# Altium PCB PCB.PcbDoc
Units mm, origin at the board's own origin, x right, y up, seen from the top; angles counter-clockwise.
Board outline 47.04 x 50.47 mm, 2 copper layers (Top Layer, Bottom Layer); 78 components, 60 nets, 244 pads, 45 vias.
Unrouted connection lines stored in the file: 1.
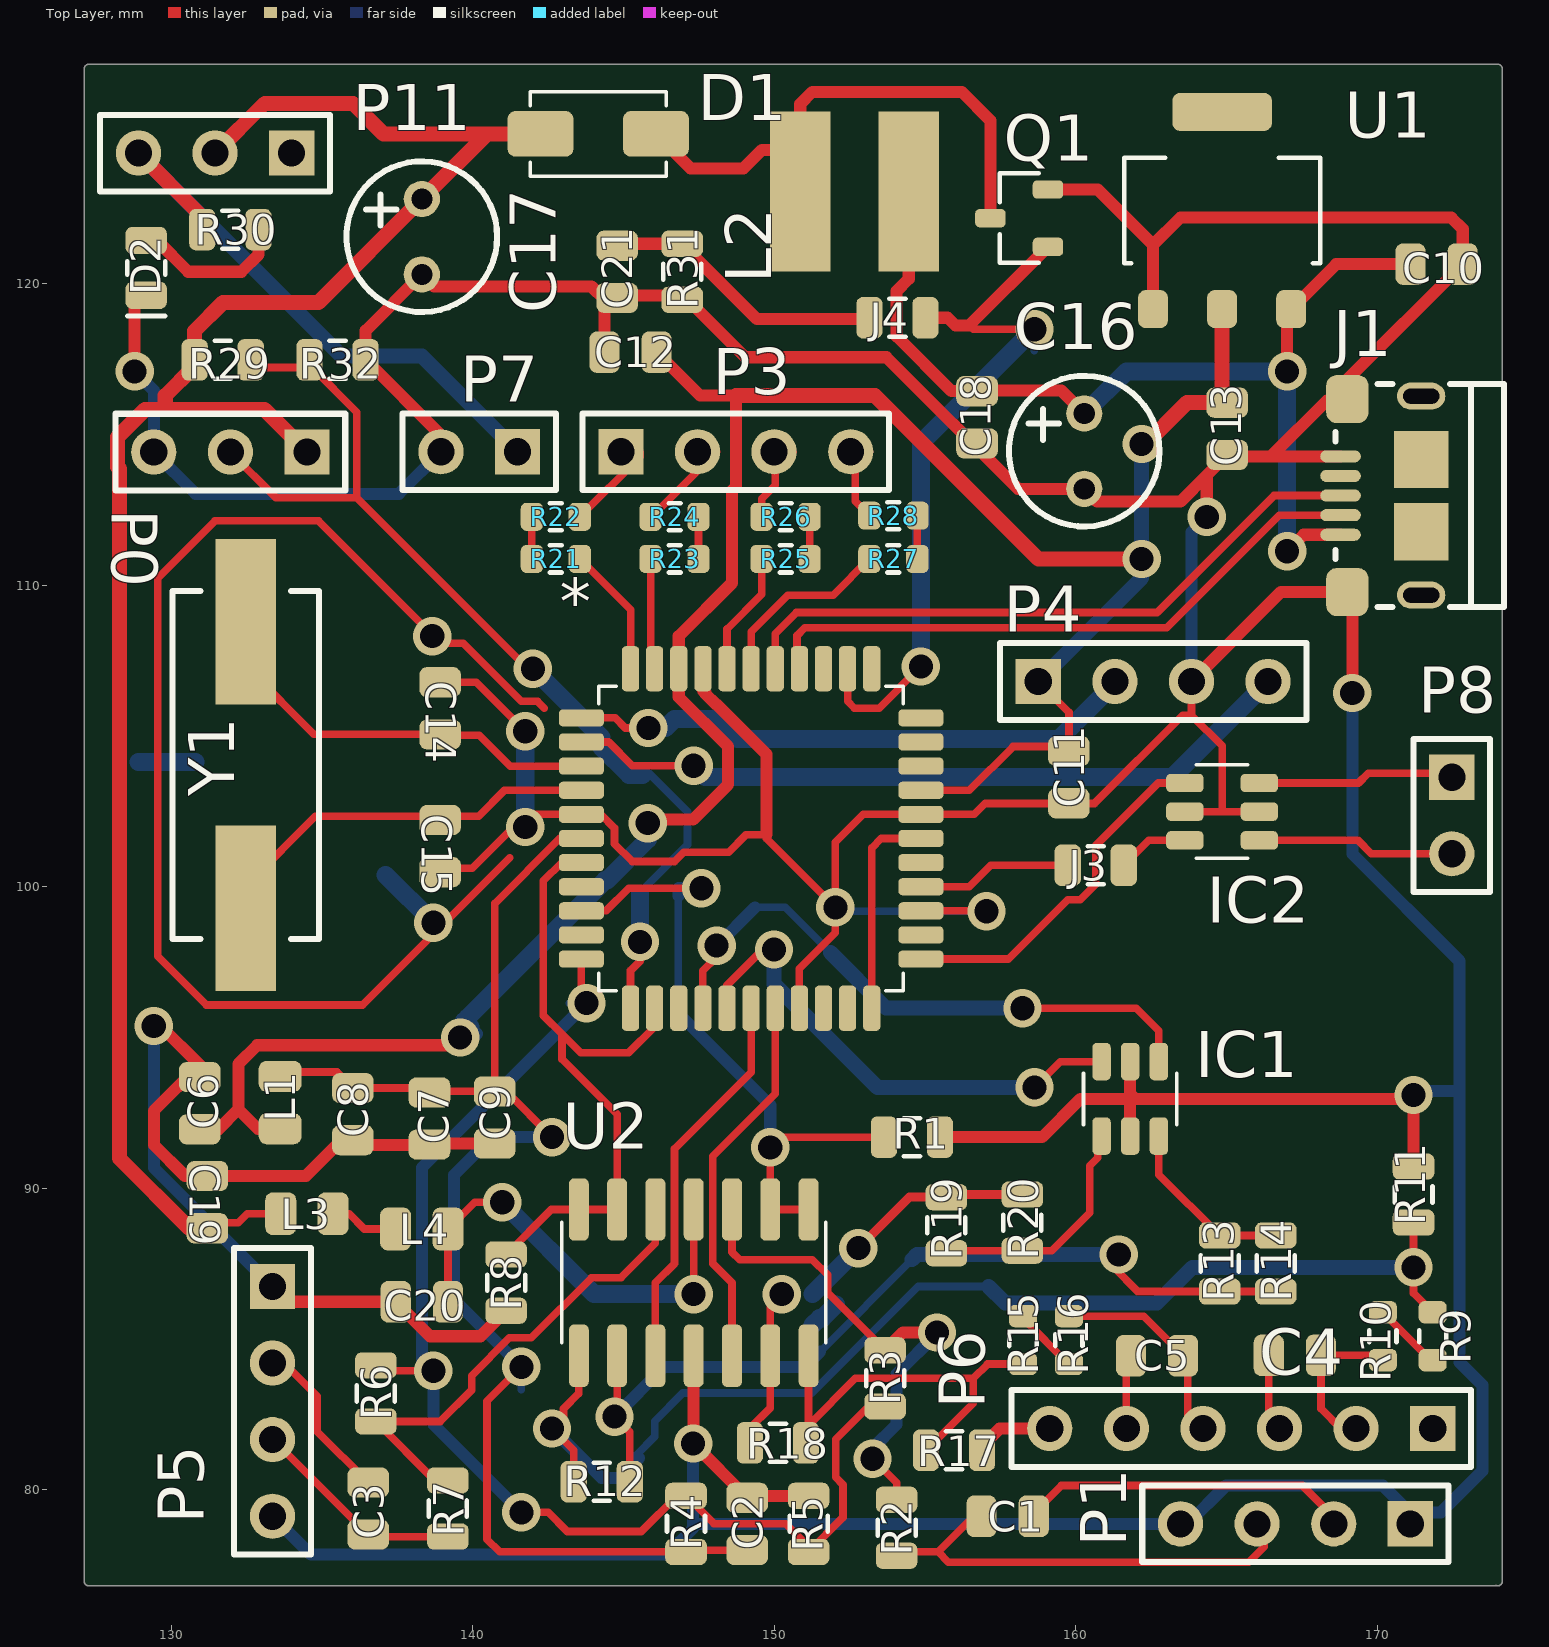
[diagram p0: Top Layer view]
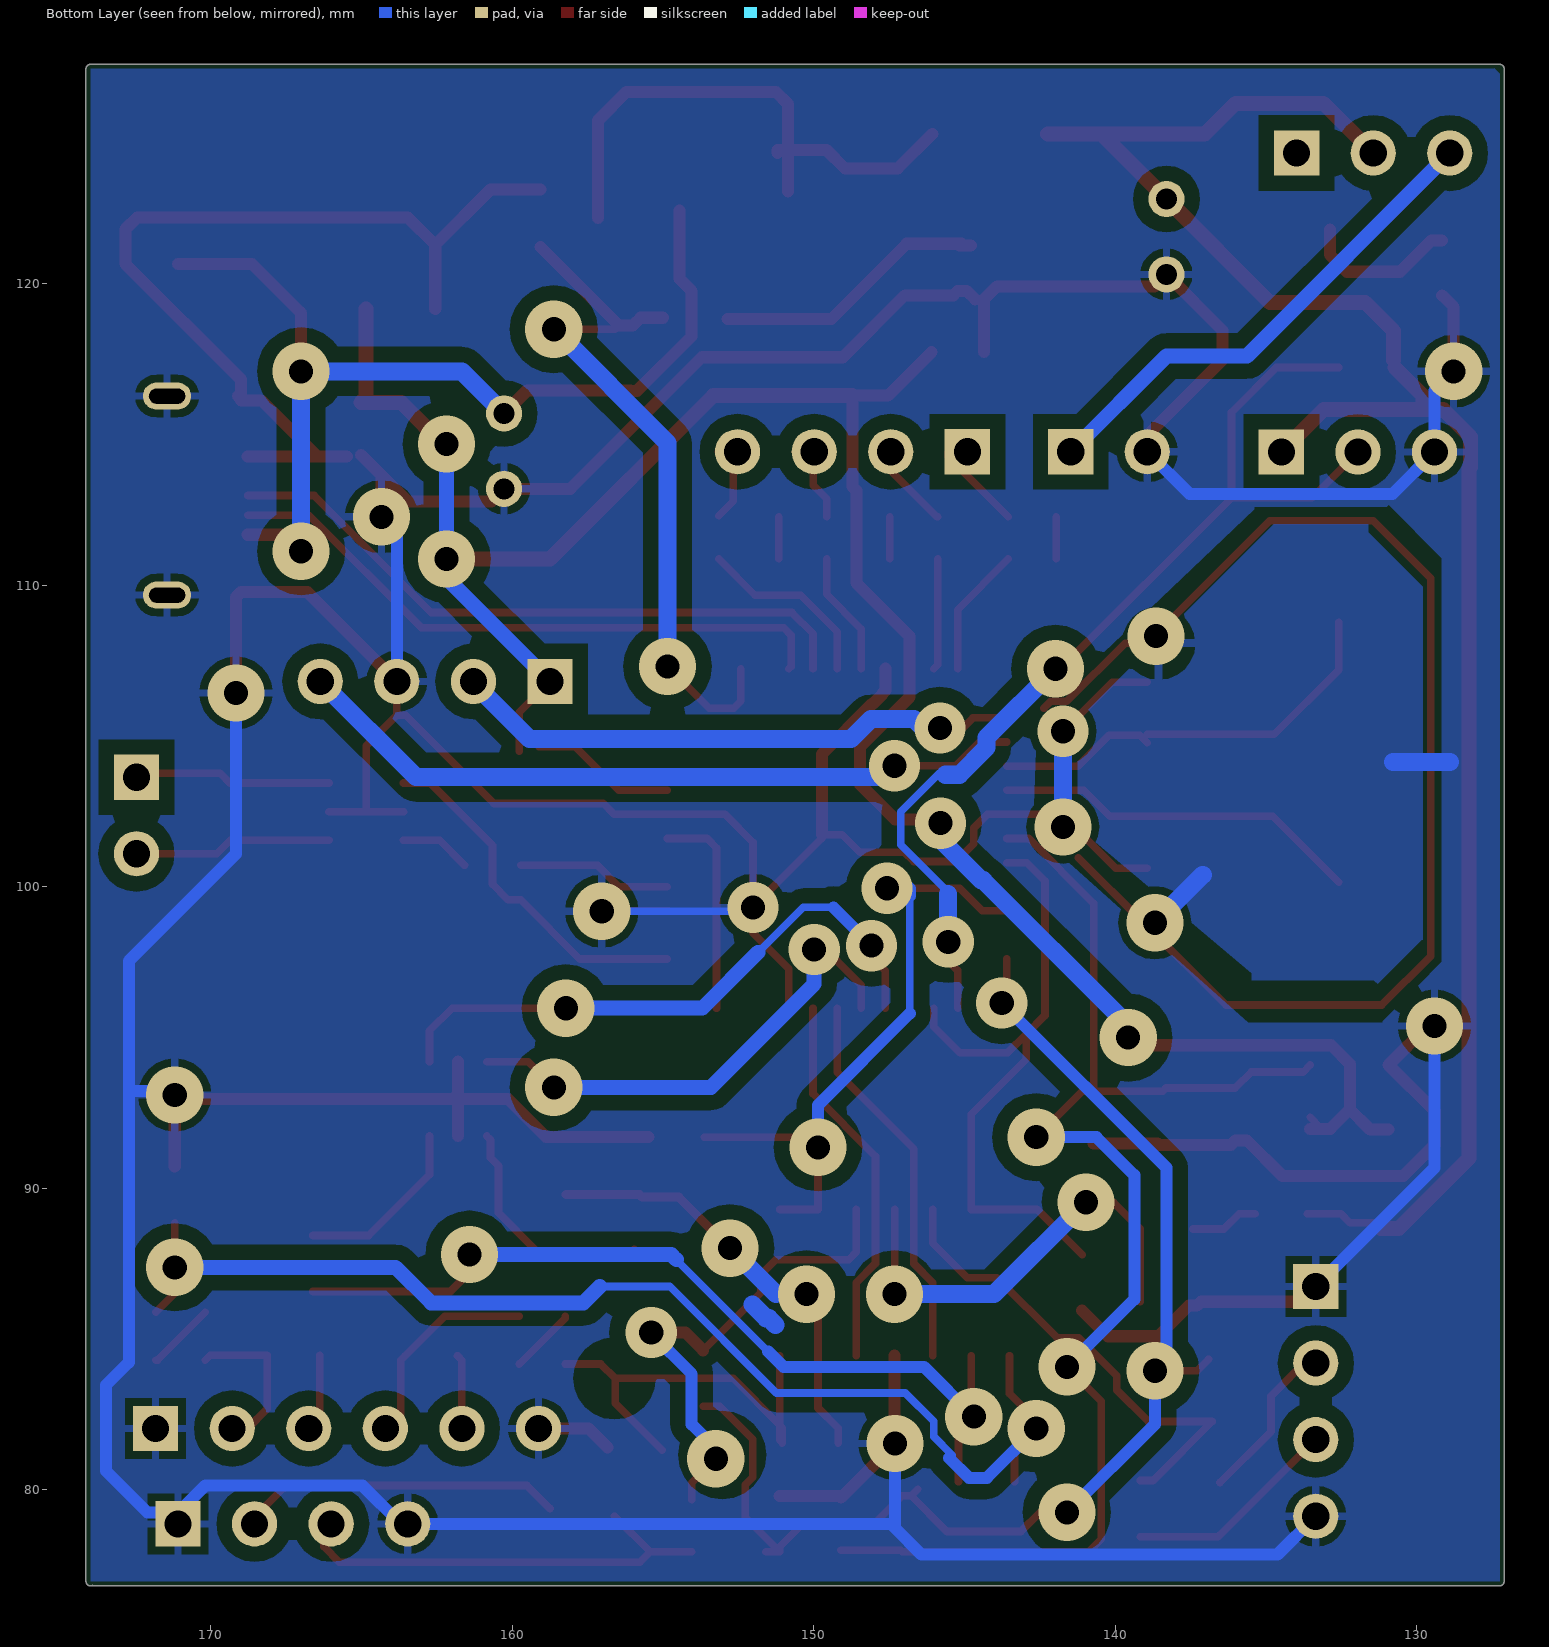
[diagram p1: Bottom Layer view, seen from below]
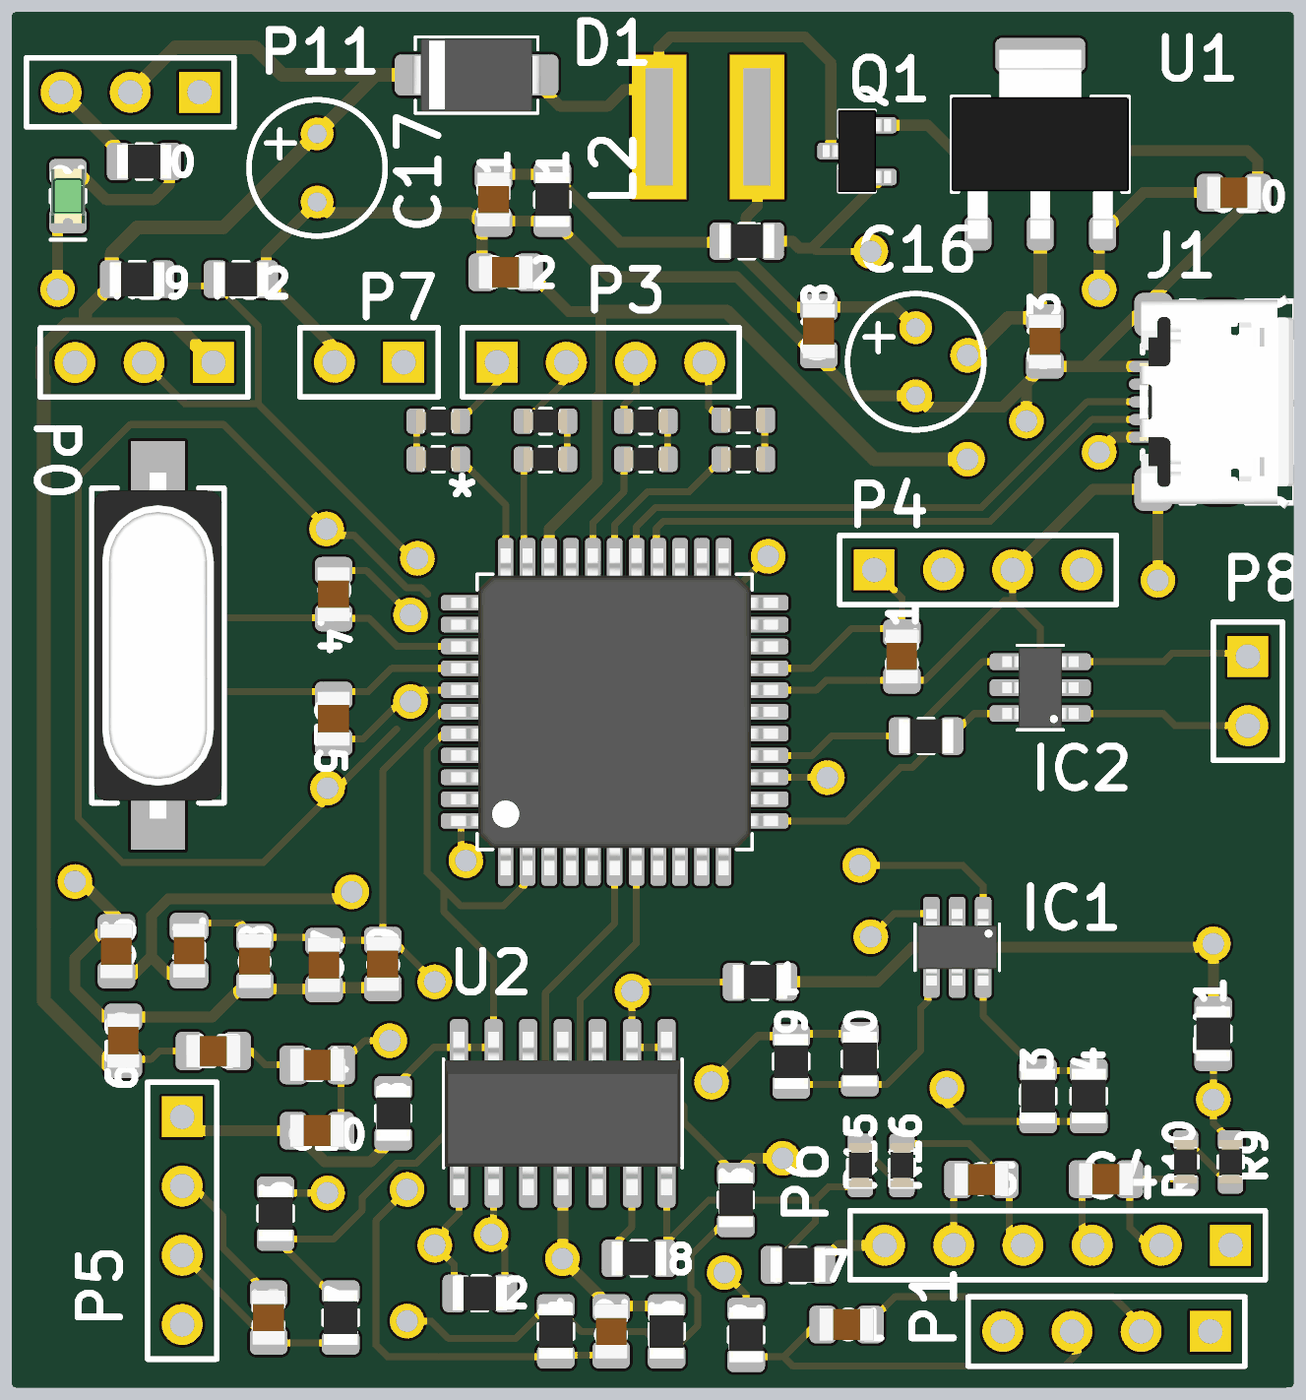
[diagram p2: 3D render of the assembled board from above, using the file's embedded part models]

## Layer stack, top to bottom
Top Solder: solder mask 0.0102, Solder Resist, Dk 3.5
Top Layer: signal copper 0.0356
Dielectric 1: dielectric 0.32, FR-4, Dk 4.8
Bottom Layer: signal copper 0.0356
Bottom Solder: solder mask 0.0102, Solder Resist, Dk 3.5

## Board outline
127.104,76.962 127.104,127.127 cw(c127.254,127.127) 127.254,127.277 173.99,127.277 cw(c173.99,127.127) 174.14,127.127 174.14,76.962 cw(c173.99,76.962) 173.927,76.826 cw(c173.863,76.962) 173.863,76.812 127.254,76.812 cw(c127.254,76.962)

## Design rules (kind name [scope] priority, off if disabled: settings)
Clearance [All] p1: gap=0.2 ignorepadtopadclearanceinfootprint=FALSE
PolygonConnect [All] p1: connectstyle=Relief reliefconductorwidth=0.254 reliefentries=4 polygonreliefangle="90 Angle" airgapwidth=0.254
RoutingVias [All] p1: holewidth=0.8 width=1.2 viastyle="Through Hole" minholewidth=0.8 minwidth=1.2 maxholewidth=0.8 maxwidth=2
SolderMaskExpansion [All] p1: expansion=0.102
Width [All] p1: maxlimit=2.54 minlimit=0.127 preferedwidth=0.254
30 further rules are at their usual default settings.

## Classes and differential pairs
component class Labrador: * C14 C15 IC2 J1 P3 P4 P8 R21 R22 R23 R24 R25 R26 R27 R28 Y1
component class Power: C6 C7 C8 C9 C10 C11 C12 C13 C16 C17 C18 C19 C20 C21 C? D1 D2 D? L1 L2 L3 L4 L? P0 P7 P11 Q1 R29 R30 R31 R32 R? U1
component class Analog: C1 C2 C3 C4 C5 IC1 P1 P5 P6 R1 R2 R3 R4 R5 R6 R7 R8 R9 R10 R11 R12 R13 R14 R15 R16 R17 R18 R19 R20 R? U2

## Components (designator, comment, footprint, x,y, rotation, side; value= is the part's Value field where it differs from the comment)
* "Atxmega32A4U-AN" QFP44P80_1200X1200X120L60X37N 149.225,101.6 r0 top locked
C1 "1µF" CAPC200X125X75L45N 157.734,79.121 r180 top
C2 "1µF" CAPC200X125X75L45N 149.098,78.867 r270 top
C3 "1µF" CAPC200X125X75L45N 136.525,79.375 r270 top
C4 "1µF" CAPC200X125X75L45N 167.259,84.455 r0 top
C5 "1µF" CAPC200X125X75L45N 162.687,84.443 r180 top
C6 "1µF" CAPC200X125X75L45N 130.937,92.818 r270 top
C7 "1nF" CAPC200X125X75L45N 138.557,92.31 r90 top
C8 "0.47µF" CAPC200X125X75L45N 136.017,92.456 r90 top
C9 "0.10µF" CAPC200X125X75L45N 140.716,92.348 r90 top
C10 "4.7µF" CAPC200X125X75L45N 171.958,120.65 r180 top
C11 "1µF" CAPC200X125X75L45N 159.766,103.632 r90 top
C12 "1µF" CAPC200X125X75L45N 145.225,117.729 r0 top
C13 "0.47µF" CAPC200X125X75L45N 165.014,115.189 r90 top
C14 "20pF" CAPC200X125X75L45N 138.91,101.346 r270 top
C15 "20pF" CAPC200X125X75L45N 138.91,105.918 r90 top
C16 "CAP_POLAR" Cap_Elec_47uF 160.274,113.197 r90 top value=220uF
C17 "CAP_POLAR" Cap_Elec_47uF 138.303,120.309 r90 top value=220uF
C18 "1µF" CAPC200X125X75L45N 156.718,115.57 r90 top
C19 "1µF" CAPC200X125X75L45N 131.191,89.535 r270 top
C20 "1µF" CAPC200X125X75L45N 138.303,86.233 r0 top
C21 "0.10µF" CAPC200X125X75L45N 144.78,120.396 r90 top
D1 "FM5819-W" DIOM470X266X220L114X139N 144.155,124.968 r0 top
D2 "RED" LEDC200X125X38L45N 129.159,120.523 r90 top
IC1 "AO6802" "ALPHAOMEGA TSOP-6" 161.798,92.964 r180 top
IC2 "AO6802" "ALPHAOMEGA TSOP-6" 164.846,102.489 r90 top
J1 "Micro USB" "FCI USB 10118193-0001LF" 171.4,112.973 r270 top
J3 "Jumper" RESC200X125X50L35N 160.655,100.711 r0 top
J4 "Jumper" RESC200X125X50L35N 154.078,118.872 r0 top
L1 "22uH" CAPC200X125X140L45N 133.604,92.842 r90 top
L2 "100uH" CD54-Modified 152.654,123.063 r180 top
L3 "22uH" CAPC200X125X140L45N 134.493,89.154 r0 top
L4 "22uH" CAPC200X125X140L45N 138.303,88.646 r0 top
P0 "Expansion" HDR1X3 134.493,114.417 r180 top
P1 "SCOPE_OUT" HDR1X4 171.088,78.867 r180 top
P3 "DIG_OUT" HDR1X4 144.907,114.427 r0 top
P4 "PDI" HDR1X4 158.75,106.807 r0 top
P5 "SCOPE_OUT" HDR1X4 133.35,86.741 r270 top
P6 "DAC_OUT" HDR1X6 171.831,82.03 r180 top
P7 "PSU" HDR1X2 141.478,114.427 r180 top
P8 "DIG_IN" HDR1X2 172.466,103.632 r270 top
P11 "SWITCH" HDR1X3 133.985,124.333 r180 top
Q1 "2N7002" SOT23-3P95_230X110L30X43N 158.115,122.174 r90 top
R1 "1K" RESC200X125X50L35N 154.559,91.694 r180 top
R2 "1M" RESC200X125X50L35N 154.051,78.74 r90 top
R3 "75K" RESC200X125X50L35N 153.67,83.693 r90 top
R4 "1K" RESC200X125X50L35N 147.066,78.867 r270 top
R5 "1K" RESC200X125X50L35N 151.13,78.867 r90 top
R6 "75K" RESC200X125X50L35N 136.779,83.193 r90 top
R7 "1M" RESC200X125X50L35N 139.168,79.375 r90 top
R8 "1K" RESC200X125X50L35N 141.097,86.868 r270 top
R9 "28R" RESC160X80X55L25N 171.831,85.09 r270 top
R10 "28R" RESC160X80X55L25N 170.18,85.09 r270 top
R11 "1K" RESC200X125X50L35N 171.196,89.789 r270 top
R12 "1K" RESC200X125X50L35N 144.272,80.264 r0 top
R13 "1K" RESC200X125X50L35N 164.766,87.503 r270 top
R14 "1K" RESC200X125X50L35N 166.624,87.503 r270 top
R15 "28R" RESC160X80X55L25N 158.242,84.963 r90 top
R16 "28R" RESC160X80X55L25N 159.766,84.963 r90 top
R17 "1K" RESC200X125X50L35N 155.956,81.309 r180 top
R18 "1K" RESC200X125X50L35N 150.114,81.551 r0 top
R19 "1K" RESC200X125X50L35N 155.702,88.773 r270 top
R20 "1K" RESC200X125X50L35N 158.223,88.859 r270 top
R21 "28R" RESC160X80X55L25N 142.748,110.871 r180 top
R22 "28R" RESC160X80X55L25N 142.748,112.268 r0 top
R23 "28R" RESC160X80X55L25N 146.685,110.871 r0 top
R24 "28R" RESC160X80X55L25N 146.685,112.268 r180 top
R25 "28R" RESC160X80X55L25N 150.368,110.871 r0 top
R26 "28R" RESC160X80X55L25N 150.368,112.268 r180 top
R27 "28R" RESC160X80X55L25N 153.943,110.871 r0 top
R28 "28R" RESC160X80X55L25N 153.943,112.308 r180 top
R29 "1K" RESC200X125X50L35N 131.699,117.475 r180 top
R30 "1K" RESC200X125X50L35N 131.953,121.793 r180 top
R31 "1K" RESC200X125X50L35N 146.939,120.396 r90 top
R32 "100R" RESC200X125X50L35N 135.509,117.475 r180 top
U1 "AMS1117-3.3" SOT223-4P229_700X180L36X74N 164.846,122.428 r0 top
U2 "LM324" SOIC14P127_865X600X175L83X41N 147.32,86.868 r180 top locked
Y1 "8MHz" "TXC 9C" 132.461,104.036 r270 top

## Footprints (in the part's own frame and the unit in brackets; to place one, negate y for a bottom-side part, rotate by r counter-clockwise, add the part's x,y. Pads: shape width x height; smd on the part's side, far side on the other; paste and mask are expansions set on the pad)
"ALPHAOMEGA TSOP-6" [mm] "Small Outline Pkg (SOP), 0.95 mm pitch; 6 pin, 2.90 mm L X 1.60 mm W X 1.25 mm H body"
  rrect49% 0.61x1.24 smd: 1(-0.95,-1.235) 2(0,-1.235) 3(0.95,-1.235) 4(0.95,1.235) 5(0,1.235) 6(-0.95,1.235)
  silkscreen extent -1.55,-0.85 1.55,0.85, body extent -1.45,-1.4 1.45,1.4, height 1.25
Cap_Elec_47uF [mm]
  round 1.2 hole 0.7: 1(0,0) 2(2.5,0)
  silkscreen extent -1.25,-2.5 3.75,2.5
CAPC200X125X75L45N [mm]
  rrect50% 1x1.38 smd: 1(-0.865,0) 2(0.865,0)
  body extent -1,-0.6 1,0.6, height 0.95
CAPC200X125X140L45N [mm] "Capacitor, Chip; 2.00 mm L X 1.25 mm W X 1.40 mm H body"
  rrect49% 1.03x1.42 smd: 1(-0.87,0) 2(0.87,0)
  body extent -1,-0.6 1,0.6, height 1.2
CD54-Modified [mm]
  rect 2x5.3 smd paste-0.5: 1(-1.8,0)
  rect 2x5.3 smd paste-0.5 mask+0.102: 2(1.8,0)
DIOM470X266X220L114X139N [mm] "Diode, Molded Body; 4.70 mm L X 2.665 mm W X 2.20 mm H body"
  rrect33% 2.18x1.51 smd: A(1.915,0) C(-1.915,0)
  silkscreen extent -2.25,-1.4 2.25,1.4, body extent -2.35,-1.33 2.35,1.33, height 2.2
"FCI USB 10118193-0001LF" [mm] "USB 2.0 Type B Micro"
  oval 0.4x1.35 smd: 1(1.3,-2.625) 2(0.65,-2.625) 3(0,-2.625) 4(-0.65,-2.625) 5(-1.3,-2.625)
  oval 0.9x1.6 hole 0.5 slot 1.2 at 90 deg: S(-3.3,0.05) S(3.3,0.05)
  rrect50% 1.6x1.4 smd: S(-3.2,-2.4) S(3.2,-2.4)
  rect 1.9x1.8 smd: S(-1.2,0.05) S(1.2,0.05)
  silkscreen extent -3.7,-2.8 3.7,2.8, body extent -3.93,-2.9 3.93,2.76, height 2.78
HDR1X2 [mm] "Connector; Header; 2 Position"
  rect 1.5x1.5 hole 0.9: 1(0,0)
  round 1.5 hole 0.9: 2(2.54,0)
  silkscreen extent -1.27,-1.27 3.81,1.27
HDR1X3 [mm] "Connector; Header; 3 Position"
  rect 1.5x1.5 hole 0.9: 1(0,0)
  round 1.5 hole 0.9: 2(2.54,0) 3(5.08,0)
  silkscreen extent -1.27,-1.27 6.35,1.27
HDR1X4 [mm] "Connector; Header; 4 Position"
  rect 1.5x1.5 hole 0.9: 1(0,0)
  round 1.5 hole 0.9: 2(2.54,0) 3(5.08,0) 4(7.62,0)
  silkscreen extent -1.27,-1.27 8.89,1.27
HDR1X6 [mm] "Connector; Header; 6 Position"
  rect 1.5x1.5 hole 0.9: 1(0,0)
  round 1.5 hole 0.9: 2(2.54,0) 3(5.08,0) 4(7.62,0) 5(10.16,0) 6(12.7,0)
  silkscreen extent -1.27,-1.27 13.97,1.27
LEDC200X125X38L45N [mm] "LED, Chip; 2.00 mm L X 1.25 mm W X 0.38 mm H body"
  rrect51% 0.91x1.38 smd: A(0.91,0) C(-0.91,0)
  silkscreen extent -1.6,-0.63 0.23,0.63, body extent -1.01,-0.62 1.01,0.63, height 1.11
QFP44P80_1200X1200X120L60X37N [mm] "Quad Flat Pack (QFP), 0.80 mm pitch; square, 11 pin X 11 pin, 10.00 mm L X 10.00 mm W X 1.20 mm H body"
  rrect49% 0.57x1.5 smd: 1(-4,-5.63) 2(-3.2,-5.63) 3(-2.4,-5.63) 4(-1.6,-5.63) 5(-0.8,-5.63) 6(0,-5.63) 7(0.8,-5.63) 8(1.6,-5.63) 9(2.4,-5.63) 10(3.2,-5.63) 11(4,-5.63) 23(4,5.63) 24(3.2,5.63) 25(2.4,5.63) 26(1.6,5.63) 27(0.8,5.63) 28(0,5.63) 29(-0.8,5.63) 30(-1.6,5.63) 31(-2.4,5.63) 32(-3.2,5.63) 33(-4,5.63)
  rrect49% 1.5x0.57 smd: 12(5.63,-4) 13(5.63,-3.2) 14(5.63,-2.4) 15(5.63,-1.6) 16(5.63,-0.8) 17(5.63,0) 18(5.63,0.8) 19(5.63,1.6) 20(5.63,2.4) 21(5.63,3.2) 22(5.63,4) 34(-5.63,4) 35(-5.63,3.2) 36(-5.63,2.4) 37(-5.63,1.6) 38(-5.63,0.8) 39(-5.63,0) 40(-5.63,-0.8) 41(-5.63,-1.6) 42(-5.63,-2.4) 43(-5.63,-3.2) 44(-5.63,-4)
  silkscreen extent -5.05,-5.05 5.05,5.05, body extent -6,-6 6,6, height 1.2
RESC160X80X55L25N [mm] "Resistor, Chip; 1.60 mm L X 0.80 mm W X 0.55 mm H body"
  rrect51% 0.74x0.93 smd: 1(-0.795,0) 2(0.795,0)
  silkscreen extent -0.2,-0.45 0.2,0.45, body extent -0.8,-0.42 0.8,0.43, height 0.44
RESC200X125X50L35N [mm] "Resistor, Chip; 2.00 mm L X 1.25 mm W X 0.50 mm H body"
  rrect51% 0.87x1.38 smd: 1(-0.93,0) 2(0.93,0)
  silkscreen extent -0.27,-0.63 0.27,0.63, body extent -1,-0.62 1,0.62, height 0.6
SOIC14P127_865X600X175L83X41N [mm]
  rrect52% 0.66x2.07 smd: 1(-3.81,-2.425) 2(-2.54,-2.425) 3(-1.27,-2.425) 4(0,-2.425) 5(1.27,-2.425) 6(2.54,-2.425) 7(3.81,-2.425) 8(3.81,2.425) 9(2.54,2.425) 10(1.27,2.425) 11(0,2.425) 12(-1.27,2.425) 13(-2.54,2.425) 14(-3.81,2.425)
  silkscreen extent -4.38,-2 4.38,2, body extent -4.33,-3 4.33,3, height 1.75
SOT23-3P95_230X110L30X43N [mm] "Small Outline Transistor (SOT23), 0.95 mm pitch; 3 pin, 2.90 mm L X 1.30 mm W X 1.10 mm H body"
  rrect49% 0.61x1.01 smd: 1(-0.95,-0.955) 2(0.95,-0.955) 3(0,0.955)
  silkscreen extent -1.48,-0.65 1.48,0.65, body extent -1.5,-1.25 1.5,1.25, height 1.09
SOT223-4P229_700X180L36X74N [mm] "Small Outline Transistor (SOT223), 2.29 mm pitch; 4 pin, 6.505 mm L X 3.505 mm W X 1.80 mm H body"
  rrect51% 0.99x1.26 smd: 1(-2.29,-3.27) 2(0,-3.27) 3(2.29,-3.27)
  rrect40% 3.3x1.26 smd: 4(0,3.27)
  silkscreen extent -3.25,-1.75 3.25,1.75, body extent -3.25,-3.47 3.25,3.47, height 1.66
"TXC 9C" [mm] "Crystal, 2-Leads, Body 4.70x11.40mm, Pitch 8.80mm, IPC Medium Density"
  rect 5.5x2 smd: 1(-4.75,0) 2(4.75,0)
  silkscreen extent -5.77,-2.43 5.77,2.43, body extent -6.35,-2.35 6.35,2.35, height 4.2

## Part data
C1 C2 C3 C4 C5 C6 C11 C12 C18 C19 C20: library part 885012107015, "1µF 25V Ceramic Capacitor X5R 0805 (2012 Metric) 0.079\" L x 0.049\" W (2.00mm x 1.25mm)", Capacitance=1uF, Case/Package=0805, Case Code (Metric)=2012, Manufacturer="Wurth Electronics", Max Operating Temperature=85°C, Min Operating Temperature=-55°C, Tolerance=20%, Voltage Rating=25V, Case Code (Imperial)=0805, Length=0.079inch, Manufacturer Part Number=885012107015, Mount="Surface Mount", Packaging="Tape and Reel", Stock 1=0, Supplier 1=Farnell, Thickness=0.053inch, Width=0.049inch
C7: library part 885012207033, "1000pF 16V Ceramic Capacitor X7R 0805 (2012 Metric) 0.079\" L x 0.049\" W (2.00mm x 1.25mm)", Case/Package=0805, Case Code (Metric)=2012, Manufacturer="Wurth Electronics", Max Operating Temperature=125°C, Min Operating Temperature=-55°C, Tolerance=10%, Voltage Rating=16V, Capacitance=1nF, Case Code (Imperial)=0805, Length=0.079inch, Manufacturer Part Number=885012207033, Mount="Surface Mount", Packaging="Tape and Reel", Pricing 1="10=0.035, 25=0.034, 50=0.032, 100=0.031, 250=0.03, 500=0.028 (USD)", Stock 1=3260, Supplier 1=Newark, Thickness=0.035inch, Width=0.049inch
C8 C13: library part 885012207020, "0.47µF 10V Ceramic Capacitor X7R 0805 (2012 Metric) 0.079\" L x 0.049\" W (2.00mm x 1.25mm)", Capacitance=470nF, Case/Package=0805, Case Code (Metric)=2012, Manufacturer="Wurth Electronics", Max Operating Temperature=125°C, Min Operating Temperature=-55°C, Tolerance=10%, Voltage Rating=10V, Case Code (Imperial)=0805, Length=0.079inch, Manufacturer Part Number=885012207020, Mount="Surface Mount", Packaging="Tape and Reel", Pricing 1="5=0.11, 10=0.098, 25=0.095, 50=0.091, 100=0.088, 250=0.083, 500=0.078 (USD)", Stock 1=2295, Supplier 1=Newark, Thickness=0.053inch, Width=0.049inch
C9 C21: library part 885012207016, "0.10µF 10V Ceramic Capacitor X7R 0805 (2012 Metric) 0.079\" L x 0.049\" W (2.00mm x 1.25mm)", Capacitance=100nF, Case/Package=0805, Case Code (Metric)=2012, Manufacturer="Wurth Electronics", Max Operating Temperature=125°C, Min Operating Temperature=-55°C, Tolerance=10%, Voltage Rating=10V, Case Code (Imperial)=0805, Length=0.079inch, Manufacturer Part Number=885012207016, Mount="Surface Mount", Packaging="Cut Tape", Pricing 1="1=0.1, 10=0.045, 50=0.045, 100=0.04, 1000=0.035, 10000=0.035 (USD)", Stock 1=13980, Supplier 1=Mouser, Thickness=0.035inch, Width=0.049inch
C10: library part 885012107013, "4.7µF 16V Ceramic Capacitor X5R 0805 (2012 Metric) 0.079\" L x 0.049\" W (2.00mm x 1.25mm)", Capacitance=4.7uF, Case/Package=0805, Case Code (Metric)=2012, Manufacturer="Wurth Electronics", Max Operating Temperature=85°C, Min Operating Temperature=-55°C, Tolerance=20%, Voltage Rating=16V, Case Code (Imperial)=0805, Length=0.079inch, Manufacturer Part Number=885012107013, Mount="Surface Mount", Packaging="Tape and Reel", Stock 1=0, Supplier 1=Farnell, Thickness=0.057inch, Width=0.049inch
C14 C15: library part CL21C180JBANNNC, "CAP CER 20PF 50V NP0 0805", Capacitance=18pF, Manufacturer="Samsung Electro-Mechanics America, Inc.", Operating Temperature="-55°C ~ 125°C", Package / Case="0805 (2012 Metric)", Ratings=-, Supplier Part Number 1=1276-1107-6-ND, Temperature Coefficient="C0G, NP0", Tolerance=±5%, Voltage - Rated=50V, Applications="General Purpose", Category=Capacitors, ComponentLink1Description=http://www.samsungsem.com/kr/support/product-search/mlcc/__icsFiles/afieldfile/2016/08/18/S_CL21C180JBANNNC.pdf, ComponentLink1URL=http://www.samsungsem.com/kr/support/product-search/mlcc/__icsFiles/afieldfile/2016/08/18/S_CL21C180JBANNNC.pdf, Features=-, Height - Seated (Max)=-, Lead Spacing=-, Lead Style=-, Manufacturer Part Number=CL21C180JBANNNC, Mounting Type="Surface Mount, MLCC", Packaging=Digi-Reel®, Part Status=Active, Pricing 1="1=0.1, 10=0.044, 25=0.032, 50=0.024, 100=0.0196, 250=0.0164, 500=0.014, 1000=0.011 (USD)", RoHS="RoHS Compliant", Size / Dimension="0.079\" L x 0.049\" W (2.00mm x 1.25mm)", Stock 1=151885, Supplier 1=Digi-Key, Thickness (Max)="0.030\" (0.75mm)"
C16 C17: "Aluminium Electrolyte 16V max"
D1: "Schottky Diodes & Rectifiers Vr/40V Io/1A T/R", Manufacturer=Rectron, Max Operating Temperature=150°C, Max Reverse Leakage Current=200uA, Max Surge Current=25A, Min Operating Temperature=-55°C, Package Quantity=5000, Element Configuration=Single, Manufacturer Part Number=FM5819-W, Packaging="Tape and Reel", Pricing 1="1=0.15, 10=0.15, 50=0.13, 100=0.1, 1000=0.072, 10000=0.042 (USD)", Stock 1=20026, Supplier 1=Mouser
D2: library part "LH R974-LP-1", "LED RED DIFFUSED 0805 SMD", Color=Red, Current - Test=20mA, Lens Color=White, Manufacturer="OSRAM Opto Semiconductors Inc.", Millicandela Rating=41mcd, Package / Case="0805 (2012 Metric)", Voltage - Forward (Vf) (Typ)=1.8V, Category=Optoelectronics, ComponentLink1Description=http://www.osram-os.com/Graphics/XPic8/00078869_0.pdf, ComponentLink1URL=http://www.osram-os.com/Graphics/XPic8/00078869_0.pdf, Features=-, Height (Max)=0.90mm, Lens Style/Size="Rectangle with Flat Top, 1.30mm x 1.25mm", Lens Transparency=Diffused, Manufacturer Part Number="LH R974-LP-1", Mounting Type="Surface Mount", Packaging="Cut Tape (CT)", Part Status=Active, Pricing 1="1=0.25, 10=0.18, 25=0.1328, 100=0.0948, 250=0.06448, 500=0.0569, 1000=0.04457 (USD)", RoHS="RoHS Compliant", Size / Dimension="2.00mm L x 1.25mm W", Stock 1=128309, Supplier 1=Digi-Key, Viewing Angle=160°, Wavelength - Dominant=645nm, Wavelength - Peak=660nm
IC1 IC2: "MOSFET 2N-CH 30V 3.5A 6-TSOP", Current Continuous Drain=3.5A, Device Package="SC-74, SOT-457", Drain to Source Voltage (Vdss)=30V, Input Capacitance (Ciss) at Vds="210pF @ 15V", Manufacturer="Alpha & Omega", Power - Max=1.15W, Supplier Part Number 1=785-1082-1-ND, ComponentLink1Description=Datasheet, ComponentLink1URL=http://aosmd.com/res/data_sheets/AO6802.pdf, ComponentLink2Description="Digi-Key Listing", ComponentLink2URL=https://www.digikey.com/product-detail/en/alpha-omega-semiconductor-inc/AO6802/785-1082-1-ND/1856025, Features="Logic Level Gate", Gate Charge (Qg)="5nC @ 10V", PartId=9696, Part Number=AO6802, Price=0.17, Rds On (Max) at Id, Vgs="50 mOhm @ 3.5A, 10V", Supplier 1=Digi-Key, Type="2 N-Channel (Dual)", Vgs(th) (Max) at Id="2.5V @ 250µA"
J1: "CONN USB MICRO B RECPT SMT R/A", Manufacturer=FCI, Part Number=10118193-0001LF, Supplier Part Number 1=609-4616-2-ND, ComponentLink1Description=Datasheet, ComponentLink1URL=http://portal.fciconnect.com/Comergent//fci/drawing/10118193.pdf, ComponentLink2Description="Digi-Key Listing", ComponentLink2URL=http://www.digikey.ca/product-detail/en/10118193-0001LF/609-4616-2-ND/2785388, Number Of Positions=5, PartId=7864, Price=0.2823, Series="USB 2.0", Supplier 1=Digi-Key, Type="USB - micro B"
L1 L3 L4: library part LBC2016T220M, "Fixed Inductor 22uH 20% 165mA", Supplier 1=Arrow
L2: library part CD75NP-331KC, "FIXED IND 100uH 400MA 1.26 OHM", Current - Saturation=-, Current Rating=400mA, DC Resistance (DCR)="1.26 Ohm Max", Inductance=330µH, Manufacturer="Sumida America Components Inc.", Operating Temperature="-40°C ~ 100°C", Package / Case=Nonstandard, Tolerance=±10%, Category="Inductors, Coils, Chokes", ComponentLink1Description=http://products.sumida.com/products/pdf/CD75.pdf, ComponentLink1URL=http://products.sumida.com/products/pdf/CD75.pdf, Frequency - Self Resonant=-, Height - Seated (Max)="0.217\" (5.50mm)", Manufacturer Part Number=CD75NP-331KC, Material - Core=Ferrite, Mounting Type="Surface Mount", Packaging="Tape & Reel (TR)", Part Status=Active, Pricing 1="500=0.504 (USD)", Q @ Freq=-, Ratings=-, RoHS="RoHS Compliant", Shielding=Unshielded, Size / Dimension="0.307\" L x 0.276\" W (7.80mm x 7.00mm)", Stock 1=0, Supplier 1=Digi-Key, Supplier Device Package=-, Type=-
P0 P11: library part "Header 3", "Header, 3-Pin", LatestRevisionDate=17-Jul-2002, LatestRevisionNote="Re-released for DXP Platform.", Publisher="Altium Limited"
P1 P3 P4 P5: library part "Header 4", "Header, 4-Pin", LatestRevisionDate=17-Jul-2002, LatestRevisionNote="Re-released for DXP Platform.", Publisher="Altium Limited"
P6: library part "Header 6", "Header, 6-Pin", LatestRevisionDate=17-Jul-2002, LatestRevisionNote="Re-released for DXP Platform.", Publisher="Altium Limited"
P7 P8: library part "Header 2", "Header, 2-Pin", LatestRevisionDate=17-Jul-2002, LatestRevisionNote="Re-released for DXP Platform.", Publisher="Altium Limited"
Q1: library part 2N7002LT1G, "MOSFET N-CH 60V 0.115A SOT-23", Current - Continuous Drain (Id) @ 25°C="115mA (Tc)", Drain to Source Voltage (Vdss)=60V, Drive Voltage (Max Rds On,  Min Rds On)="5V, 10V", Input Capacitance (Ciss) (Max) @ Vds="50pF @ 25V", Manufacturer="ON Semiconductor", Operating Temperature="-55°C ~ 150°C (TJ)", Package / Case="TO-236-3, SC-59, SOT-23-3", Power Dissipation (Max)="225mW (Ta)", Supplier Device Package="SOT-23-3 (TO-236)", Category="Discrete Semiconductor Products", ComponentLink1Description=http://www.onsemi.com/pub_link/Collateral/2N7002L-D.PDF, ComponentLink1URL=http://www.onsemi.com/pub_link/Collateral/2N7002L-D.PDF, FET Feature=-, FET Type=N-Channel, Gate Charge (Qg) (Max) @ Vgs=-, Manufacturer Part Number=2N7002LT1G, Mounting Type="Surface Mount", Packaging="Cut Tape (CT)", Part Status=Active, Pricing 1="1=0.14, 10=0.129, 100=0.0704, 500=0.0433, 1000=0.02952 (USD)", Rds On (Max) @ Id, Vgs="7.5 Ohm @ 500mA, 10V", RoHS="RoHS Compliant", Stock 1=446807, Supplier 1=Digi-Key, Technology="MOSFET (Metal Oxide)", Vgs (Max)=±20V, Vgs(th) (Max) @ Id="2.5V @ 250µA"
R1 R4 R5 R8 R11 R12 R13 R14 R17 R18 R19 R20 R29 R30 R31: library part RC0805FR-071KL, "RES SMD 1K OHM 1% 1/8W 0805", Manufacturer=Yageo, Operating Temperature="-55°C ~ 155°C", Package / Case="0805 (2012 Metric)", Power (Watts)="0.125W, 1/8W", Resistance (Ohms)=1k, Supplier Device Package=0805, Temperature Coefficient=±100ppm/°C, Tolerance=±1%, Category=Resistors, ComponentLink1Description=http://www.yageo.com/NewPortal/yageodocoutput?fileName=/pdf/R-Chip/PYu-RC_Group_51_RoHS_L_4.pdf, ComponentLink1URL=http://www.yageo.com/NewPortal/yageodocoutput?fileName=/pdf/R-Chip/PYu-RC_Group_51_RoHS_L_4.pdf, Composition="Thick Film", Failure Rate=-, Features="Moisture Resistant", Height - Seated (Max)="0.024\" (0.60mm)", Manufacturer Part Number=RC0805FR-071KL, Number of Terminations=2, Packaging="Cut Tape (CT)", Part Status=Active, Pricing 1="1=0.1, 10=0.019, 25=0.0136, 50=0.0104, 100=0.0077, 250=0.00584, 500=0.00468, 1000=0.00345 (USD)", RoHS="RoHS Compliant", Size / Dimension="0.079\" L x 0.049\" W (2.00mm x 1.25mm)", Stock 1=6960895, Supplier 1=Digi-Key
R2 R7: library part RC0805JR-071ML, "RES SMD 1M OHM 5% 1/8W 0805", Case/Package=0805, Case Code (Metric)=2012, Manufacturer=Yageo, Max Operating Temperature=155°C, Max Power Dissipation=125mW, Min Operating Temperature=-55°C, Package Quantity=1, Resistance=1MR, Temperature Coefficient=100ppm/°C, Tolerance=5%, Voltage Rating=150V, Case Code (Imperial)=0805, ComponentLink1Description=http://www.yageo.com/documents/recent/PYu-RC_Group_51_RoHS_L_9.pdf, ComponentLink1URL=http://www.yageo.com/documents/recent/PYu-RC_Group_51_RoHS_L_9.pdf, ComponentLink2Description=http://www.yageo.ru/pdf/RC0805.pdf, ComponentLink2URL=http://www.yageo.ru/pdf/RC0805.pdf, ComponentLink3Description=http://www.farnell.com/datasheets/442941.pdf, ComponentLink3URL=http://www.farnell.com/datasheets/442941.pdf, ComponentLink4Description=http://www.farnell.com/datasheets/444164.pdf, ComponentLink4URL=http://www.farnell.com/datasheets/444164.pdf, Composition="Thick Film", Contact Plating=Lead,Matte,Tin, Depth=1.25mm, Features="Moisture Resistant", Height=0.024inch, Lead Free="Lead Free", Length=0.079inch, Manufacturer Part Number=RC0805JR-071ML, Military Standard=Not, Number of Terminations=2, Packaging="Tape and Reel", Power Rating=125mW, Radiation Hardening=No, REACH SVHC=Unknown, Stock 1=0, Supplier 1="Future Electronics", Termination=SMD/SMT, Width=0.049inch
R3 R6: library part RT0805FRE0775KL, "RES SMD 75K OHM 1% 1/8W 0805", Case/Package=0805, Case Code (Metric)=2012, Manufacturer=Yageo, Max Operating Temperature=125°C, Max Power Dissipation=125mW, Min Operating Temperature=-55°C, Package Quantity=5000, Resistance=75kR, Temperature Coefficient=50ppm/°C, Tolerance=1%, Voltage Rating=150V, Case Code (Imperial)=0805, ComponentLink1Description=http://www.yageo.com/documents/recent/PYu-RT_1-to-0.01_RoHS_L_8.pdf, ComponentLink1URL=http://www.yageo.com/documents/recent/PYu-RT_1-to-0.01_RoHS_L_8.pdf, ComponentLink2Description=http://www.mouser.com/ds/2/447/yageodocoutput-1125656.pdf, ComponentLink2URL=http://www.mouser.com/ds/2/447/yageodocoutput-1125656.pdf, Composition="Thin Film", Contact Plating=Matte,Tin, Depth=1.25mm, Height=0.024inch, Lead Free="Lead Free", Length=2mm, Manufacturer Part Number=RT0805FRE0775KL, Military Standard=Not, Number of Terminations=2, Packaging="Tape and Reel", Power Rating=125mW, Radiation Hardening=No, Stock 1=0, Supplier 1=Arrow, Termination=SMD/SMT, Voltage Rating (DC)=150V, Weight=0.000194oz, Width=0.049inch
R9 R10 R15 R16 R21 R22 R23 R24 R25 R26 R27 R28: library part RC0603FR-0728RL, "RES SMD 28 OHM 1% 1/10W 0603", Case/Package=0603, Case Code (Metric)=1608, Manufacturer=Yageo, Max Operating Temperature=155°C, Max Power Dissipation=100mW, Min Operating Temperature=-55°C, Package Quantity=1, Temperature Coefficient=100ppm/°C, Tolerance=1%, Voltage Rating=50V, Case Code (Imperial)=0603, ComponentLink1Description=http://www.yageo.com/documents/recent/PYu-RC_Group_51_RoHS_L_9.pdf, ComponentLink1URL=http://www.yageo.com/documents/recent/PYu-RC_Group_51_RoHS_L_9.pdf, ComponentLink2Description=http://www.yageo.com/documents/recent/PYu-RC0603_51_RoHS_L_4.pdf, ComponentLink2URL=http://www.yageo.com/documents/recent/PYu-RC0603_51_RoHS_L_4.pdf, Composition="Thick Film", Contact Plating=Matte,Tin, Depth=0.8mm, Features="Moisture Resistant", Height=0.022inch, Lead Free="Lead Free", Length=0.063inch, Manufacturer Part Number=RC0603FR-0728RL, Military Standard=Not, Number of Terminations=2, Packaging="Tape and Reel", Power Rating=100mW, Resistance=28R, Stock 1=0, Supplier 1="Future Electronics", Termination=SMD/SMT, Voltage Rating (DC)=50V, Width=0.031inch
R32: library part RC0805JR-07100RL, "YAGEO         RC0805JR-07100RL             RES, THICK FILM, 100R, 5%, 0.125W, 0805", Case/Package=0805, Case Code (Metric)=2012, Manufacturer=Yageo, Max Operating Temperature=155°C, Min Operating Temperature=-55°C, Power Rating=125mW, Temperature Coefficient=100ppm/°C, Tolerance=5%, Voltage Rating=150V, Case Code (Imperial)=0805, ComponentLink1Description=http://www.farnell.com/datasheets/444164.pdf, ComponentLink1URL=http://www.farnell.com/datasheets/444164.pdf, ComponentLink2Description=http://www.farnell.com/datasheets/2167052.pdf, ComponentLink2URL=http://www.farnell.com/datasheets/2167052.pdf, ComponentLink3Description=http://www.farnell.com/datasheets/442941.pdf, ComponentLink3URL=http://www.farnell.com/datasheets/442941.pdf, ComponentLink4Description=http://www.yageo.ru/pdf/RC0805.pdf, ComponentLink4URL=http://www.yageo.ru/pdf/RC0805.pdf, Composition="Thick Film", Contact Plating=Lead,Matte,Tin, Lead Free="Lead Free", Manufacturer Part Number=RC0805JR-07100RL, Packaging="Tape and Reel", Radiation Hardening=No, REACH SVHC=Unknown, Resistance=100R, Stock 1=0, Supplier 1="Future Electronics", Termination=SMD/SMT
U1: "Linear Reg 3.3, 1.2V dropout"
U2: library part LM324MX, "IC OPAMP GP 14SOIC", Case/Package=SOP, Input Bias Current=250nA, Input Offset Voltage (Vos)=7mV, Manufacturer="ON Semiconductor / Fairchild", Max Dual Supply Voltage=16V, Max Frequency=20kHz, Max Input Voltage=32V, Max Operating Temperature=70°C, Max Power Dissipation=640mW, Min Dual Supply Voltage=1.5V, Min Input Voltage=-300mV, Min Operating Temperature=0°C, Min Supply Voltage=3V, Nominal Supply Current=1.2mA, Operating Supply Current=1mA, Output Current=40mA, Package Quantity=3000, Power Supply Rejection Ratio (PSRR)=65dB, Voltage Gain=100dB, Common Mode Rejection Ratio=65dB, ComponentLink1Description=https://www.fairchildsemi.com/datasheets/LM/LM2902.pdf, ComponentLink1URL=https://www.fairchildsemi.com/datasheets/LM/LM2902.pdf, ComponentLink2Description=http://www.fairchildsemi.com/datasheets/LM/LM324.pdf, ComponentLink2URL=http://www.fairchildsemi.com/datasheets/LM/LM324.pdf, ComponentLink3Description=https://www.fairchildsemi.com/datasheets/LM/LM324.pdf, ComponentLink3URL=https://www.fairchildsemi.com/datasheets/LM/LM324.pdf, ComponentLink4Description=http://www.fairchildsemi.com/ds/LM/LM2902.pdf, ComponentLink4URL=http://www.fairchildsemi.com/ds/LM/LM2902.pdf, ComponentLink5Description=http://www.fairchildsemi.com/ds/LM/LM324.pdf, ComponentLink5URL=http://www.fairchildsemi.com/ds/LM/LM324.pdf, ComponentLink6Description=http://datasheet.iiic.cc/fairchild/LM324MX.pdf, ComponentLink6URL=http://datasheet.iiic.cc/fairchild/LM324MX.pdf, Contact Plating=Matte,Tin, Height=1.65mm, Lead Free="Lead Free", Length=8.76mm, Manufacturer Part Number=LM324MX, Max Supply Voltage=32V, Mount="Surface Mount", Number of Amplifiers=4, Number of Channels=4, Number of Circuits=4, Number of Elements=4, Number of Pins=14, Operating Supply Voltage=32V, Output Current per Channel=40mA, Packaging="Tape and Reel", Power Dissipation=640mW, Radiation Hardening=No, REACH SVHC="No SVHC", Stock 1=0, Supplier 1="Future Electronics", Weight=0.2183g, Width=4.2mm
Y1: library part ATS08ASM-1, "Crystals 8MHz 20pF", ESR (Equivalent Series Resistance)=60R, Frequency Stability=50ppm, Frequency Tolerance=30ppm, Load Capacitance=20pF, Manufacturer=CTS, Max Operating Temperature=70°C, Min Operating Temperature=-20°C, Package Quantity=1000, ComponentLink1Description=http://www.ctscorp.com/wp-content/uploads/ATS-ATSSM.pdf, ComponentLink1URL=http://www.ctscorp.com/wp-content/uploads/ATS-ATSSM.pdf, ComponentLink2Description=https://www.ctscorp.com/wp-content/uploads/ATS-ATSSM.pdf, ComponentLink2URL=https://www.ctscorp.com/wp-content/uploads/ATS-ATSSM.pdf, Frequency=8MHz, Height=0.169inch, Lead Free="Lead Free", Length=0.437inch, Manufacturer Part Number=ATS08ASM-1, Mount="Surface Mount", Packaging="Tape and Reel", Radiation Hardening=No, Series Resistance=60R, Stock 1=0, Supplier 1="Future Electronics", Termination=SMD/SMT, Tolerance=30ppm, Width=4.83mm

## Via types
v1: diameter 1.27/1.9 (per signal layer), hole 0.8, Top Layer to Bottom Layer, 34 vias
v2: diameter 1.27/1.7 (per signal layer), hole 0.8, Top Layer to Bottom Layer, 11 vias

## Nets (pads, with @x,y where several pads share a name; then routed paths per layer and width w, separated by ;. In a path a pad name is that pad's centre, name@x,y a point inside that pad or via, vN(x,y) a via of type N, cw(c..) or ccw(c..) an arc to the next point about the centre after c; other vN are vias at no path point)
+5: C10.2 C16.2 C18.2 J1.1 L2.1 U1.3 | length 34.2
  Top Layer w0.4: L2.1@154.454,122.428 154.454,120.16 154.051,119.757 154.051,118.256 155.867,116.44 C18.2@156.718,116.44 ; C18.2@156.083,116.459 159.512,116.459 C16.2 ; v1(167.005,111.125) 167.553,111.673 J1.1 ; v1(167.005,117.094) 167.005,119.027 U1.3 168.628,120.65 C10.2@171.088,120.65
  Bottom Layer w0.6: C16.2 161.671,117.094 v1(167.005,117.094) v1(167.005,111.125)
AVCC: *.39 C2.2 C7.2 C8.2 C9.2 L1.2 R4.2 | length 46.9
  Top Layer w0.254: L1.2@133.537,94.088 133.772,93.853 135.49,93.853 136.017,93.326 138.322,93.326 138.43,93.218 C9.2@140.716,93.218 ; v1(141.605,84.074) 140.462,82.931 140.462,78.359 140.884,77.937 R4.2 147.126,77.997 C2.2@149.098,77.997 ; v1(142.621,91.694) 141.097,93.218 C9.2@140.716,93.218 ; *.39 142.875,101.6 140.716,99.441 C9.2@140.716,93.218
  Bottom Layer w0.254: v1@141.605,83.312 v1(141.605,84.074)
  Bottom Layer w0.4: v1(141.605,84.074) 139.367,86.312 139.367,90.434 140.626,91.694 v1(142.621,91.694)
AVCC_ON_2: *.44 R3.1 R4.1 R5.1 R6.2 | length 43.4
  Top Layer w0.254: R6.2@136.906,84.328 137.287,83.947 v1(138.684,83.947) ; v1(141.605,79.248) 142.494,79.248 143.129,78.613 145.585,78.613 R4.1@146.769,79.797 ; *.44 143.595,96.308 v2(143.764,96.139) ; R4.1@146.556,80.01 R4.1@146.769,79.797 ; R4.1@146.782,79.784 R4.1@146.769,79.797 ; R5.1@151.597,77.937 R5.1 ; R3.1 153.123,82.763 152.028,81.668 152.028,80.412 152.273,80.166 152.273,79.08 R5.1 ; R4.1@146.769,79.797 R4.1 147.996,78.867 150.368,78.867 151.13,78.105 R5.1
  Bottom Layer w0.254: v1(138.684,83.947) v1@138.684,84.201 ; v1(141.605,79.248) v1@141.605,79.502 ; v2@143.196,96.139 v2(143.764,96.139)
  Bottom Layer w0.4: v1(141.605,79.248) 138.684,82.169 v1(138.684,83.947) 138.303,84.328 138.303,90.678 v2(143.764,96.139)
CH1: *.42 R1.2 U2.1 U2.2 | length 22.1
  Top Layer w0.254: *.42 144.412,99.2 145.161,99.949 v2(147.574,99.949) ; U2.1 U2.2 v1(149.86,91.354) 150.2,91.694 R1.2
  Bottom Layer w0.254: 146.812,95.799 v2@146.812,99.695
  Bottom Layer w0.4: 146.812,95.799 149.86,92.751 v1(149.86,91.354) ; v2@146.812,99.695 146.812,99.937 146.824,99.949 v2(147.574,99.949)
CH2: *.2 *.40 R8.1 U2.6 U2.7 | length 22
  Top Layer w0.254: R8.1 142.592,89.293 U2.7 U2.6 144.78,92.456 142.954,94.282 142.954,95.108 ; *.40 142.94,100.8 142.334,100.194 142.334,95.729 142.954,95.108 ; *.2 146.025,95.354 145.159,94.488 143.575,94.488 142.954,95.108
D+: *.27 J1.3 | length 21.8
  Top Layer w0.254: *.27 150.025,108.393 150.725,109.093 162.687,109.093 166.567,112.973 J1.3
D-: *.26 J1.2 | length 20.8
  Top Layer w0.254: *.26 150.749,107.306 150.749,108.331 151.003,108.585 163.011,108.585 166.749,112.323 J1.2
DAC_OUT: *.6 U2.10 | length 12.8
  Top Layer w0.254: U2.10 146.05,86.868 146.685,87.503 146.685,91.313 149.225,93.853 *.6
DAC_OUT2: *.7 U2.12 | length 12.6
  Top Layer w0.254: U2.12 148.59,86.868 147.955,87.503 147.955,91.059 150.025,93.129 *.7
DIG_CH1: *.15 IC2.6 J3.1 J3.2 | length 7.5
  Top Layer w0.254: *.15 156.464,100 157.175,100.711 J3.1 ; J3.2 162.413,101.539 IC2.6
DIG_CH2: *.12 IC2.4 | length 11.9
  Top Layer w0.254: *.12 157.757,97.6 159.725,99.568 160.147,99.568 160.655,100.076 160.655,101.366 162.728,103.439 IC2.4
GND: *.8 *.14 *.18 *.30 *.38 C2.1 C6.1 C7.1 C8.1 C9.1 C10.1 C11.1 C12.1 C13.1 C14.2 C15.2 C16.1 C17.1 C18.1 C19.1 C20.1 C21.1 D2.C IC1.2 IC1.5 IC2.2 IC2.5 J1.5 J1.S P0.3 P1.1 P1.4 P4.3 P5.1 P5.4 P6.1 P6.6 P7.2 Q1.2 R1.1 R5.2 R8.2 R11.1 R17.1 R31.1 R32.1 U1.1 U2.11 | length 359.6
  Top Layer w0.254: v1(138.649,108.311) v1@138.704,108.311 ; v1(138.684,98.806) v1@139.065,98.806 ; C14.2@138.938,100.608 139.978,100.608 141.77,102.4 *.38 144.239,102.4 144.692,101.947 144.692,101.429 145.283,100.838 146.685,100.838 146.994,101.147 148.476,101.147 149.056,101.727 149.733,101.727 ; C15.2@138.938,106.783 140.105,106.783 v2(141.732,105.156) ; 141.224,100.965 v1@139.065,98.806 ; 142.367,105.918 142.138,106.147 141.605,106.147 139.675,108.077 138.938,108.077 v1@138.704,108.311 ; 149.733,101.6 v2(152.019,99.314) ; *.8 150.825,97.282 152.019,98.476 v2(152.019,99.314) ; *.14 157.019,99.2 v1(157.032,99.187) ; IC2.5 164.846,102.489 ; P4.3 163.83,105.689 ; IC2.2 164.846,102.489 ; v1@138.704,108.311 134.874,112.141 131.445,112.141 129.54,110.236 129.54,97.696 131.158,96.078 136.337,96.078 v1@139.065,98.806 ; v2(152.019,99.314) 152.019,101.473 152.946,102.4 *.18 156.627,102.4 156.989,102.762 160.613,102.762 163.54,105.689 163.83,105.689 ; 163.83,105.689 164.846,104.673 164.846,102.489
  Top Layer w0.4: v1(128.778,117.094) 128.778,119.232 D2.C ; v1(129.413,95.377) 129.648,95.377 130.937,94.088 129.413,92.564 129.413,91.44 130.448,90.405 134.455,90.405 135.636,91.586 136.017,91.586 136.163,91.44 138.557,91.44 138.595,91.478 C9.1@140.716,91.478 ; P5.1 133.858,86.233 137.16,86.233 137.287,86.106 137.56,86.106 138.576,85.09 140.249,85.09 R8.2 ; P7.2 138.938,114.976 R32.1 136.439,118.445 C17.1 138.705,119.907 143.93,119.907 144.355,119.482 C12.1@144.355,117.729 ; C21.1@144.647,119.482 144.926,119.761 145.225,119.761 145.373,119.613 146.979,119.613 149.031,117.561 153.711,117.561 158.075,113.197 C16.1 160.695,112.776 163.471,112.776 164.338,113.643 ; U2.11 147.32,81.551 v1(147.303,81.534) 147.303,81.532 149.098,79.737 149.158,79.797 R5.2 ; *.30 147.625,106.502 147.72,106.407 147.72,106.388 148.048,106.06 148.067,106.06 149.733,104.394 149.733,101.727 ; R1.1 158.877,91.694 160.147,92.964 161.798,92.964 IC1.5 ; R17.1@156.845,81.407 157.468,82.03 P6.6 ; Q1.2 160.721,123.124 162.556,121.289 ; IC1.2 161.798,93.129 161.963,92.964 171.069,92.964 v1(171.196,93.091) R11.1 ; U1.1 162.556,121.289 ; P4.3 166.796,109.773 169,109.773 169.164,109.609 v1(169.164,106.426) ; v1(164.338,112.268) 164.338,113.643 ; C13.1@165.014,114.319 164.338,113.643 ; C13.1@165.476,114.273 166.47,114.273 ; J1.5 166.47,114.273 ; J1.S@169.1,116.273 J1.S@169,116.173 ; J1.S@171.35,116.173 J1.S@171.45,116.273 ; J1.S@171.45,109.673 171.35,109.773 J1.S@171.45,109.873 ; 162.556,121.289 163.46,122.193 172.447,122.193 172.828,121.812 172.828,120.65 169,116.822 J1.S@169,116.173 ; 166.47,114.273 168.329,116.132 169,116.132 J1.S@169,116.173
  Bottom Layer w0.254: v1@141.478,102.235 v1(141.732,101.981) ; v2@141.732,105.08 141.77,105.118 v2(141.732,105.156) v2@141.732,105.283 ; v2(152.019,99.314) 152.146,99.187 v1(157.032,99.187)
  Bottom Layer w0.4: v1(128.778,117.094) 129.413,116.459 P0.3 130.8,113.03 137.541,113.03 P7.2 ; v1(129.413,95.377) 129.413,90.678 P5.1 ; P5.4 134.62,77.851 146.431,77.851 147.32,78.74 147.303,78.757 ; v1(147.303,81.534) 147.303,78.757 ; P4.3 163.83,111.76 v1(164.338,112.268) ; v1(169.164,106.426) 169.164,101.092 172.72,97.536 172.72,93.218 ; P1.1@171.078,79.239 P1.1@171.069,79.248 ; v1(171.196,93.091) 171.323,93.218 172.72,93.218 ; P1.1@171.323,78.867 P1.1@170.942,79.248 ; 147.303,78.757 147.413,78.867 P1.4 163.703,78.867 164.973,80.137 170.18,80.137 P1.1@171.069,79.248 ; P1.1@170.942,79.248 P1.1@171.069,79.248 ; P1.1@170.942,79.248 170.688,79.248 170.815,79.375 P1.1@170.942,79.248 ; P1.1@171.069,79.248 172.104,79.248 173.482,80.626 173.482,83.466 172.72,84.228 172.72,93.218
  Bottom Layer w0.6: 128.905,104.14 130.789,104.14 ; 137.1,100.39 v1(138.684,98.806) ; v1(141.732,101.981) 141.732,105.08 v2(141.732,105.156)
Net*_28: *.28 R27.1 | length 6.2
  Top Layer w0.25: *.28 149.225,108.458 150.44,109.673 151.95,109.673 R27.1
Net*_29: *.29 R25.1 | length 4.1
  Top Layer w0.25: *.29 148.425,108.547 149.573,109.695 R25.1
Net*_32: *.32 R23.1 | length 3.7
  Top Layer w0.25: R23.1 145.89,107.365 *.32
Net*_33: *.33 R21.1 | length 4.3
  Top Layer w0.25: R21.1 145.225,109.189 *.33
Net*_36: *.36 C15.1 Y1.1 | length 14
  Top Layer w0.254: Y1.1@132.588,108.763 132.588,107.188 134.723,105.053 C15.1@138.938,105.053 ; C15.1@138.938,104.775 139.192,105.029 140.208,105.029 141.237,104 *.36
Net*_37: *.37 C14.1 Y1.2 | length 12.3
  Top Layer w0.254: Y1.2@132.588,100.152 134.774,102.338 138.938,102.338 140.184,102.338 141.046,103.2 *.37
NetC1_1: C1.1 P1.2 | length 10.9
  Top Layer w0.254: C1.1@158.75,79.375 159.512,80.137 167.513,80.137 P1.2@168.783,78.867
NetC1_2: C1.2 P1.3 R2.1 | length 15
  Top Layer w0.254: R2.1@154.051,77.937 155.426,77.937 ; C1.2@156.61,79.121 155.426,77.937 ; P1.3@166.243,78.867 166.243,78.105 165.735,77.597 155.766,77.597 155.426,77.937
NetC3_1: C3.1 P5.2 | length 5.4
  Top Layer w0.254: P5.2@133.544,84.395 134.836,83.103 134.836,81.929 C3.1
NetC3_2: C3.2 P5.3 R7.1 | length 7.2
  Top Layer w0.253: P5.3 133.374,81.661 C3.2 136.59,78.445 R7.1
NetC4_1: C4.1 P6.3 | length 2.5
  Top Layer w0.254: P6.3@166.243,82.03 166.389,82.176 C4.1@166.389,84.455
NetC4_2: C4.2 P6.2 R10.2 | length 4.8
  Top Layer w0.254: P6.2@168.783,82.03 168.129,82.684 168.129,84.455 170.02,84.455 R10.2
NetC5_1: C5.1 P6.4 R16.2 | length 6.8
  Top Layer w0.254: R16.2 162.242,85.758 163.557,84.443 163.703,84.297 P6.4@163.703,82.03
NetC5_2: C5.2 P6.5 | length 2.5
  Top Layer w0.254: P6.5 161.671,84.297 C5.2@161.817,84.443
NetC17_2: C17.2 C19.2 D1.C L3.1 P0.1 P11.2 R29.2 | length 64.7
  Top Layer w0.254: C19.2@131.191,88.665 131.385,88.859 132.219,88.859 132.514,89.154 L3.1
  Top Layer w0.5: R29.2@130.728,117.221 129.794,116.287 129.794,115.824 ; R29.2 130.769,118.437 131.712,119.38 134.874,119.38 C17.2 140.462,124.968 ; C19.2@131.191,88.665 130.598,88.665 128.27,90.993 128.27,113.863 128.213,113.92 128.213,114.914 129.123,115.824 129.794,115.824 ; P11.2 133.096,125.984 136.017,125.984 137.033,124.968 140.462,124.968 ; P0.1 133.086,115.824 129.794,115.824 ; D1.C 140.462,124.968
NetD1_A: D1.A L2.2 Q1.3 | length 19
  Top Layer w0.4: D1.A 147.213,123.825 148.971,123.825 149.581,124.435 L2.2@150.854,124.435 ; L2.2 L2.2@150.854,124.435 ; L2.2@151.204,124.333 151.204,124.435 L2.2@150.854,124.435 ; Q1.3 157.16,125.415 156.21,126.365 151.257,126.365 150.854,125.962 L2.2@150.854,124.435
NetD2_A: D2.A R30.1 | length 5.2
  Top Layer w0.4: D2.A 129.519,121.433 130.556,120.396 132.315,120.396 132.883,120.964 R30.1
NetIC1_4: IC1.4 R19.2 R20.2 | length 7.7
  Top Layer w0.254: R19.2@155.956,87.97 155.997,87.929 158.115,87.929 159.201,87.929 160.457,89.185 160.457,90.742 160.723,91.008 160.723,91.604 IC1.4
NetIC1_6: IC1.6 R13.1 R14.1 | length 6
  Top Layer w0.254: IC1.6 162.748,90.451 R13.1 R14.1
NetIC2_1: IC2.1 P8.2 | length 7.1
  Top Layer w0.254: IC2.1 169.353,101.539 169.8,101.092 P8.2@172.085,101.092 ; P8.2 P8.2@172.085,101.092 ; P8.2@172.466,101.473 P8.2@172.085,101.092
NetIC2_3: IC2.3 P8.1 | length 6.6
  Top Layer w0.254: IC2.3 169.371,103.439 169.691,103.759 172.212,103.759 P8.1@172.466,104.013
NetL3_2: L3.2 L4.1 | length 2.3
  Top Layer w0.254: L3.2 135.89,89.154 136.398,88.646 L4.1
NetP3_1: P3.1 R22.2 | length 3
  Top Layer w0.25: R22.2 145.542,114.267 P3.1@145.542,114.427
NetP3_2: P3.2 R24.2 | length 3.1
  Top Layer w0.25: R24.2 145.923,112.268 P3.2@148.082,114.427
NetP3_3: P3.3 R26.2 | length 2.6
  Top Layer w0.25: R26.2 149.573,112.87 150.025,113.322 150.025,113.83 P3.3@150.622,114.427
NetP3_4: P3.4 R28.2 | length 2.5
  Top Layer w0.25: R28.2 152.673,112.783 152.673,113.938 P3.4@153.162,114.427
NetP7_1: P7.1 P11.3 R30.2 | length 19.5
  Top Layer w0.5: P11.3 R30.2@130.937,122.301
  Bottom Layer w0.5: P11.3 135.636,117.602 138.303,117.602 P7.1
NetR2_2: R2.2 R3.2 U2.3 | length 16.9
  Top Layer w0.253: U2.3 148.59,87.884 148.844,87.63 151.257,87.63 151.765,87.122 151.765,86.528 R3.2 ; v1(153.248,81.026) 154.051,80.223 R2.2
  Top Layer w0.4: R3.2 154.264,85.217 v2(155.392,85.217)
  Bottom Layer w0.4: v1(153.248,81.026) 153.248,81.366 154.051,82.169 154.051,83.842 155.392,85.183 v2(155.392,85.217)
NetR6_1: R6.1 R7.2 U2.5 | length 16.3
  Top Layer w0.253: R7.2 138.737,80.305 R6.1 138.91,82.263 139.954,83.307 139.954,83.783 141.207,85.035 141.931,85.035 143.932,87.036 144.907,87.036 146.05,88.179 U2.5
NetR9_1: R9.1 R11.2 R12.1 U2.8 | length 41.3
  Top Layer w0.254: R12.1 143.342,81.309 v1(142.621,82.03) 143.001,82.03 143.001,82.684 143.51,83.193 U2.8 ; R11.2 v1(171.196,87.376) 171.196,86.52 R9.1
  Bottom Layer w0.254: 145.408,81.146 146.026,81.764 146.026,82.272 146.961,83.207 151.238,83.207 154.772,86.741 157.099,86.741
  Bottom Layer w0.4: v1(142.621,82.03) 144.26,80.391 144.852,80.391 145.508,81.046
  Bottom Layer w0.5: 157.099,86.741 157.642,86.198 162.691,86.198 163.869,87.376 v1(171.196,87.376)
NetR9_2: R9.2 R10.1 | length 2.3
  Top Layer w0.254: R10.1 171.77,84.295 R9.2
NetR12_2: R12.2 R13.2 R14.2 U2.9 | length 29.7
  Top Layer w0.254: U2.9 144.78,82.511 v1(144.692,82.423) 145.202,81.913 R12.2 ; v1(161.417,87.798) 161.417,87.544 161.249,87.376 162.052,86.573 R13.2 R14.2
  Bottom Layer w0.254: 151.511,84.582 154.559,87.63 ; v1@161.417,87.63 v1(161.417,87.798)
  Bottom Layer w0.4: v1(144.692,82.423) 146.343,84.074 151.003,84.074 151.511,84.582
  Bottom Layer w0.5: 154.559,87.63 154.727,87.798 v1(161.417,87.798)
NetR15_1: R15.1 R17.2 R18.2 U2.14 | length 14.5
  Top Layer w0.253: U2.14 R18.2@151.13,82.144 ; R17.2 156.591,82.874 156.591,83.693 ; R15.1 157.066,84.168 156.591,83.693 ; R18.2@151.13,82.144 152.679,83.693 156.591,83.693 ; R18.2@151.13,82.144 151.044,82.058 R18.2 151.13,81.637 R18.2@151.13,82.144
NetR15_2: R15.2 R16.1 | length 2.2
  Top Layer w0.254: R15.2 158.242,85.692 R16.1
NetR18_1: R18.1 R19.1 R20.1 U2.13 | length 13.7
  Top Layer w0.253: R18.1 149.184,82.034 149.86,82.71 U2.13 149.86,86.106 v1(150.241,86.487)
  Top Layer w0.3: v1(152.781,88.011) 154.473,89.703 R19.1 155.788,89.789 R20.1
  Bottom Layer w0.6: 151.257,86.487 v1(152.781,88.011)
NetR21_2: R21.2 R22.1 | length 1.4
  Top Layer w0.25: R21.2 R22.1
NetR23_2: R23.2 R24.1 | length 1.4
  Top Layer w0.25: R23.2 R24.1
NetR25_2: R25.2 R26.1 | length 1.4
  Top Layer w0.25: R25.2 R26.1
NetR27_2: R27.2 R28.1 | length 1.4
  Top Layer w0.25: R27.2 R28.1
OPAMP_VCC: C20.2 L4.2 U2.4 | length 15.4
  Top Layer w0.254: C20.2@139.173,86.233 L4.2 140.062,89.535 v1(140.97,89.535) ; v1(147.32,86.487) U2.4
  Bottom Layer w0.254: v1@140.589,89.535 v1(140.97,89.535)
  Bottom Layer w0.6: v1(140.97,89.535) 144.018,86.487 v1(147.32,86.487)
PDI_CLK: *.35 P4.4 | length 25
  Top Layer w0.254: *.35 144.501,104.8 145.288,104.013 v2(147.32,104.013)
  Bottom Layer w0.254: P4.4@165.989,106.807 P4.4
  Bottom Layer w0.6: v2(147.32,104.013) 147.701,103.632 163.195,103.632 P4.4
PDI_DATA: *.34 P4.2 | length 19.1
  Top Layer w0.254: *.34 144.717,105.6 145.054,105.263 v2(145.816,105.263)
  Bottom Layer w0.6: v2(145.816,105.263) 146.378,105.263 146.678,105.563 148.106,105.563 148.767,104.902 159.435,104.902 161.29,106.757 P4.2
PSU_FDBCK: *.1 P0.2 R29.1 R32.2 | length 35.1
  Top Layer w0.254: P0.2 133.467,112.903 136.144,112.903 ; R29.1@132.588,117.221 134.665,117.221 136.144,115.742 136.144,112.903 ; v1(141.986,107.23) 141.817,107.23 136.144,112.903 ; *.1 145.225,97.219 145.542,97.536 v2(145.542,98.171) v2@145.542,98.552
  Bottom Layer w0.254: v1(141.986,107.23) v1@142.156,107.23 ; 145.546,99.818 147.115,101.387 147.115,102.482 145.838,103.759 145.627,103.759
  Bottom Layer w0.6: v1(141.986,107.23) 144.266,104.95 144.266,104.621 145.174,103.713 145.627,103.713 ; v2(145.542,98.171) 145.542,99.757
PSU_PWM: *.24 C21.2 J4.1 J4.2 Q1.1 R31.2 | length 34.4
  Top Layer w0.25: *.24 152.425,106.147 152.654,105.918 153.467,105.918 v1(154.855,107.306) ; 156.464,118.618 156.591,118.491 v1(158.623,118.491)
  Top Layer w0.4: C21.2@144.78,121.266 145.161,121.266 145.101,121.326 146.917,121.326 149.417,118.826 J4.1@152.867,118.826 ; J4.2 155.743,118.872 155.997,118.618 156.464,118.618 Q1.1
  Bottom Layer w0.25: v1@158.623,117.772 v1(158.623,118.491)
  Bottom Layer w0.6: v1(154.855,107.306) 154.855,114.723 v1(158.623,118.491)
TO_B0: *.4 IC1.1 | length 20.6
  Top Layer w0.254: *.4 147.625,97.206 148.082,97.663 v2(148.082,98.044) ; v1@158.223,95.492 v1(158.223,95.97) 161.994,95.97 162.748,95.216 IC1.1
  Bottom Layer w0.254: 149.352,99.314 150.354,99.314 151.531,98.137 151.533,98.137 151.856,97.814
  Bottom Layer w0.4: v2(148.082,98.044) 149.352,99.314
  Bottom Layer w0.5: 151.856,97.814 153.7,95.97 v1(158.223,95.97)
TO_B1: *.5 IC1.3 | length 17.6
  Top Layer w0.254: *.5 148.425,96.736 149.987,98.298 v2(149.987,97.917) ; v1@158.623,92.842 v1(158.623,93.345) 159.477,94.199 IC1.3
  Bottom Layer w0.5: v2(149.987,97.917) 149.987,96.774 153.416,93.345 v1(158.623,93.345)
VCC_3V3: *.9 *.19 *.31 C6.2 C11.2 C12.2 C13.2 L1.1 P4.1 U1.2 | length 83.7
  Top Layer w0.254: L1.1@133.201,92.011 L1.1@133.537,92.348 ; *.19 156.464,103.2 157.912,104.648 C11.2@159.112,104.648 ; P4.1 159.766,105.791 C11.2@159.766,104.502
  Top Layer w0.4: C6.2@130.937,91.948 131.553,91.948 132.219,92.614 ; L1.1@133.541,91.967 132.866,91.967 132.219,92.614 ; v1(139.573,94.996) 139.319,94.742 132.842,94.742 132.219,94.119 132.219,92.614 ; v2(145.796,102.108) 145.796,101.794 145.953,101.951 146.232,102.23 147.303,102.23 148.463,103.39 148.463,104.648 146.825,106.286 *.31 146.825,108.311 148.59,110.076 148.59,113.138 148.717,113.265 148.717,116.287 147.537,116.287 C12.2@146.095,117.729
  Top Layer w0.5: 148.717,116.287 153.334,116.287 158.75,110.871 v1(162.179,110.871) ; v1(162.179,114.681) 162.179,114.554 163.684,116.059 165.014,116.059 164.846,116.227 U1.2
  Bottom Layer w0.4: v1@139.711,95.546 139.827,95.43 139.827,95.661 v1@139.827,95.691 ; v1@139.917,95.34 v1@140.134,95.123 ; v2@145.796,101.66 v2(145.796,102.108)
  Bottom Layer w0.5: P4.1 162.179,110.236 v1(162.179,110.871) v1(162.179,114.681)
  Bottom Layer w0.6: v1(139.573,94.996) v1@139.917,95.34 ; v1@139.711,95.546 139.827,95.661 144.379,100.213 144.442,100.213 145.796,101.567 v2@145.796,101.66
XCK: *.11 *.17 | length 7.1
  Top Layer w0.254: *.11 153.225,101.282 153.543,101.6 *.17
pads on no net: *.3 *.10 *.13 *.16 *.20 *.21 *.22 *.23 *.25 *.41 *.43 J1.4 P11.1 U1.4
copper on no net: | length 1.1
  Bottom Layer w0.6: 151.266,85.462 151.492,85.687 151.588,85.687 151.739,85.838 152.04,86.138

## Polygon pours and split planes (outlines as drawn)
GND on Bottom Layer "Bottom Layer-GND" (solid, remove dead copper, pour order 0): 127.254,127.143 128.651,127.127 173.99,127.127 173.99,76.962 127.254,76.962
GND on Bottom Layer "Bottom Layer-GND 1" (solid, pour order 4): 141.246,105.515 134.747,112.014 131.607,112.014 131.607,111.756 129.794,109.943 129.832,109.905 129.832,98.238 129.841,98.238 131.242,96.837 136.109,96.837 141.246,101.975

## Other copper
Top Layer:
  pour cut-out: 141.696,106.725 135.676,112.745 130.806,112.745 128.905,110.844 128.905,97.228 130.409,95.724 136.068,95.724 141.817,101.473
Bottom Layer:
  pour cut-out: 142.586,105.664 135.382,112.522 135.382,112.588 130.998,112.588 130.937,112.649 129.181,110.893 129.181,97.512 131.149,95.544 131.149,95.504 135.584,95.504 142.726,101.854 141.246,101.975 135.472,97.127 135.472,96.901 131.424,96.901 131.297,96.774 129.832,98.238 129.794,98.238 129.794,109.943 131.607,111.756 131.607,112.014 134.747,112.014 141.246,105.515 141.246,101.975 142.726,101.854

## Silkscreen, mask and mechanical layers (free items; w line width, h text height)
Mechanical 1:
  lines w0.3: 173.863,76.962 127.254,76.962 127.254,127.127 173.99,127.127 173.99,76.962